# Altium PCB machnguon2.PcbDoc
Units mm, origin at the board's own origin, x right, y up, seen from the top; angles counter-clockwise.
Board outline 150.11 x 149.99 mm, 2 copper layers (Top Layer, Bottom Layer); 40 components, 24 nets, 103 pads, 0 vias.
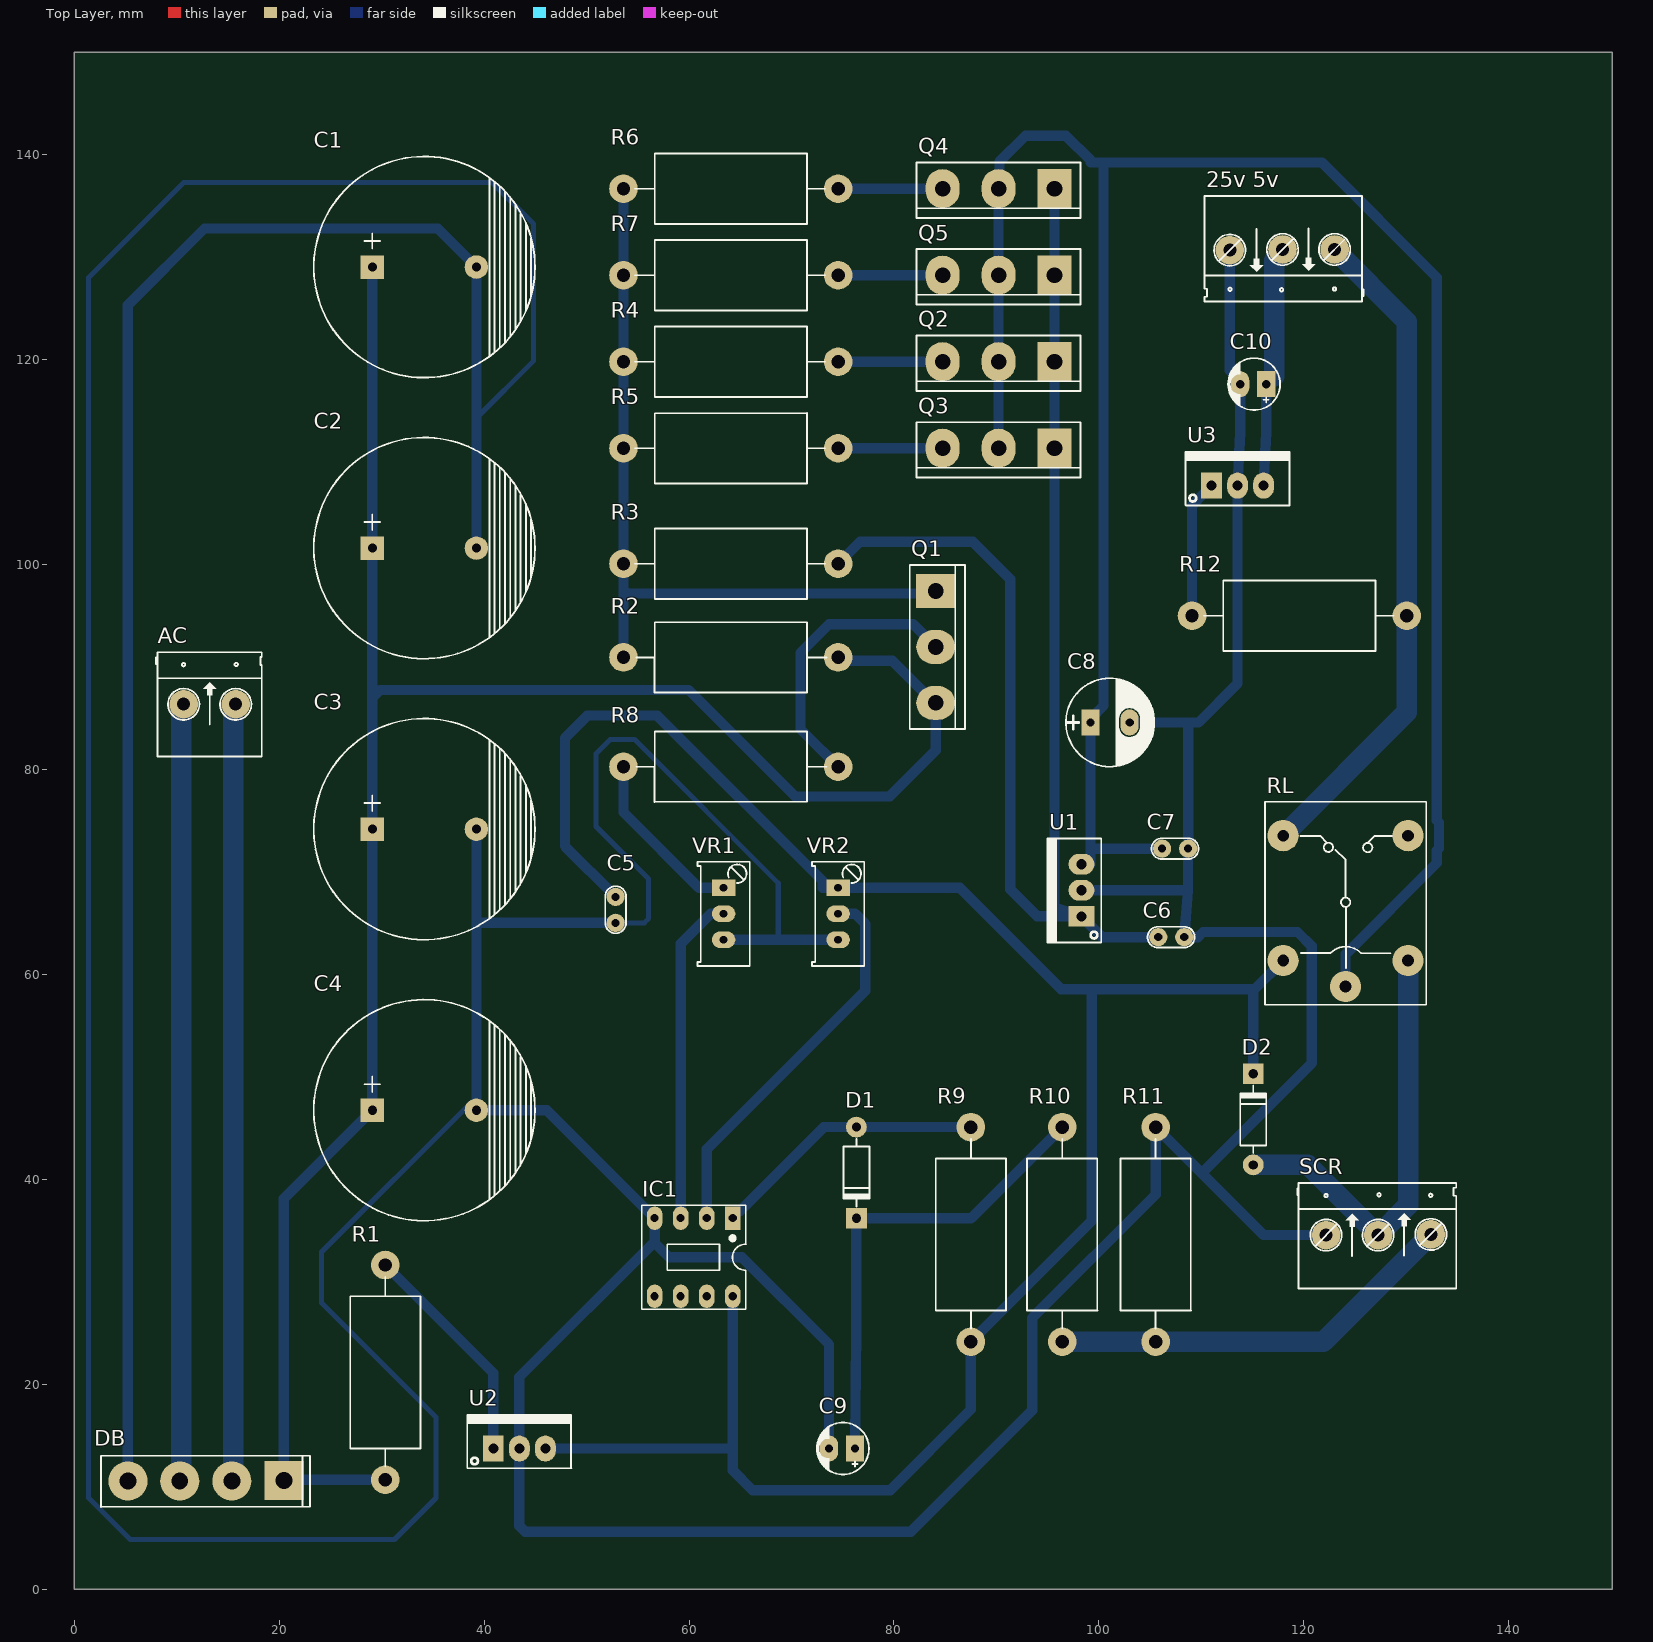
[diagram p0: Top Layer view]
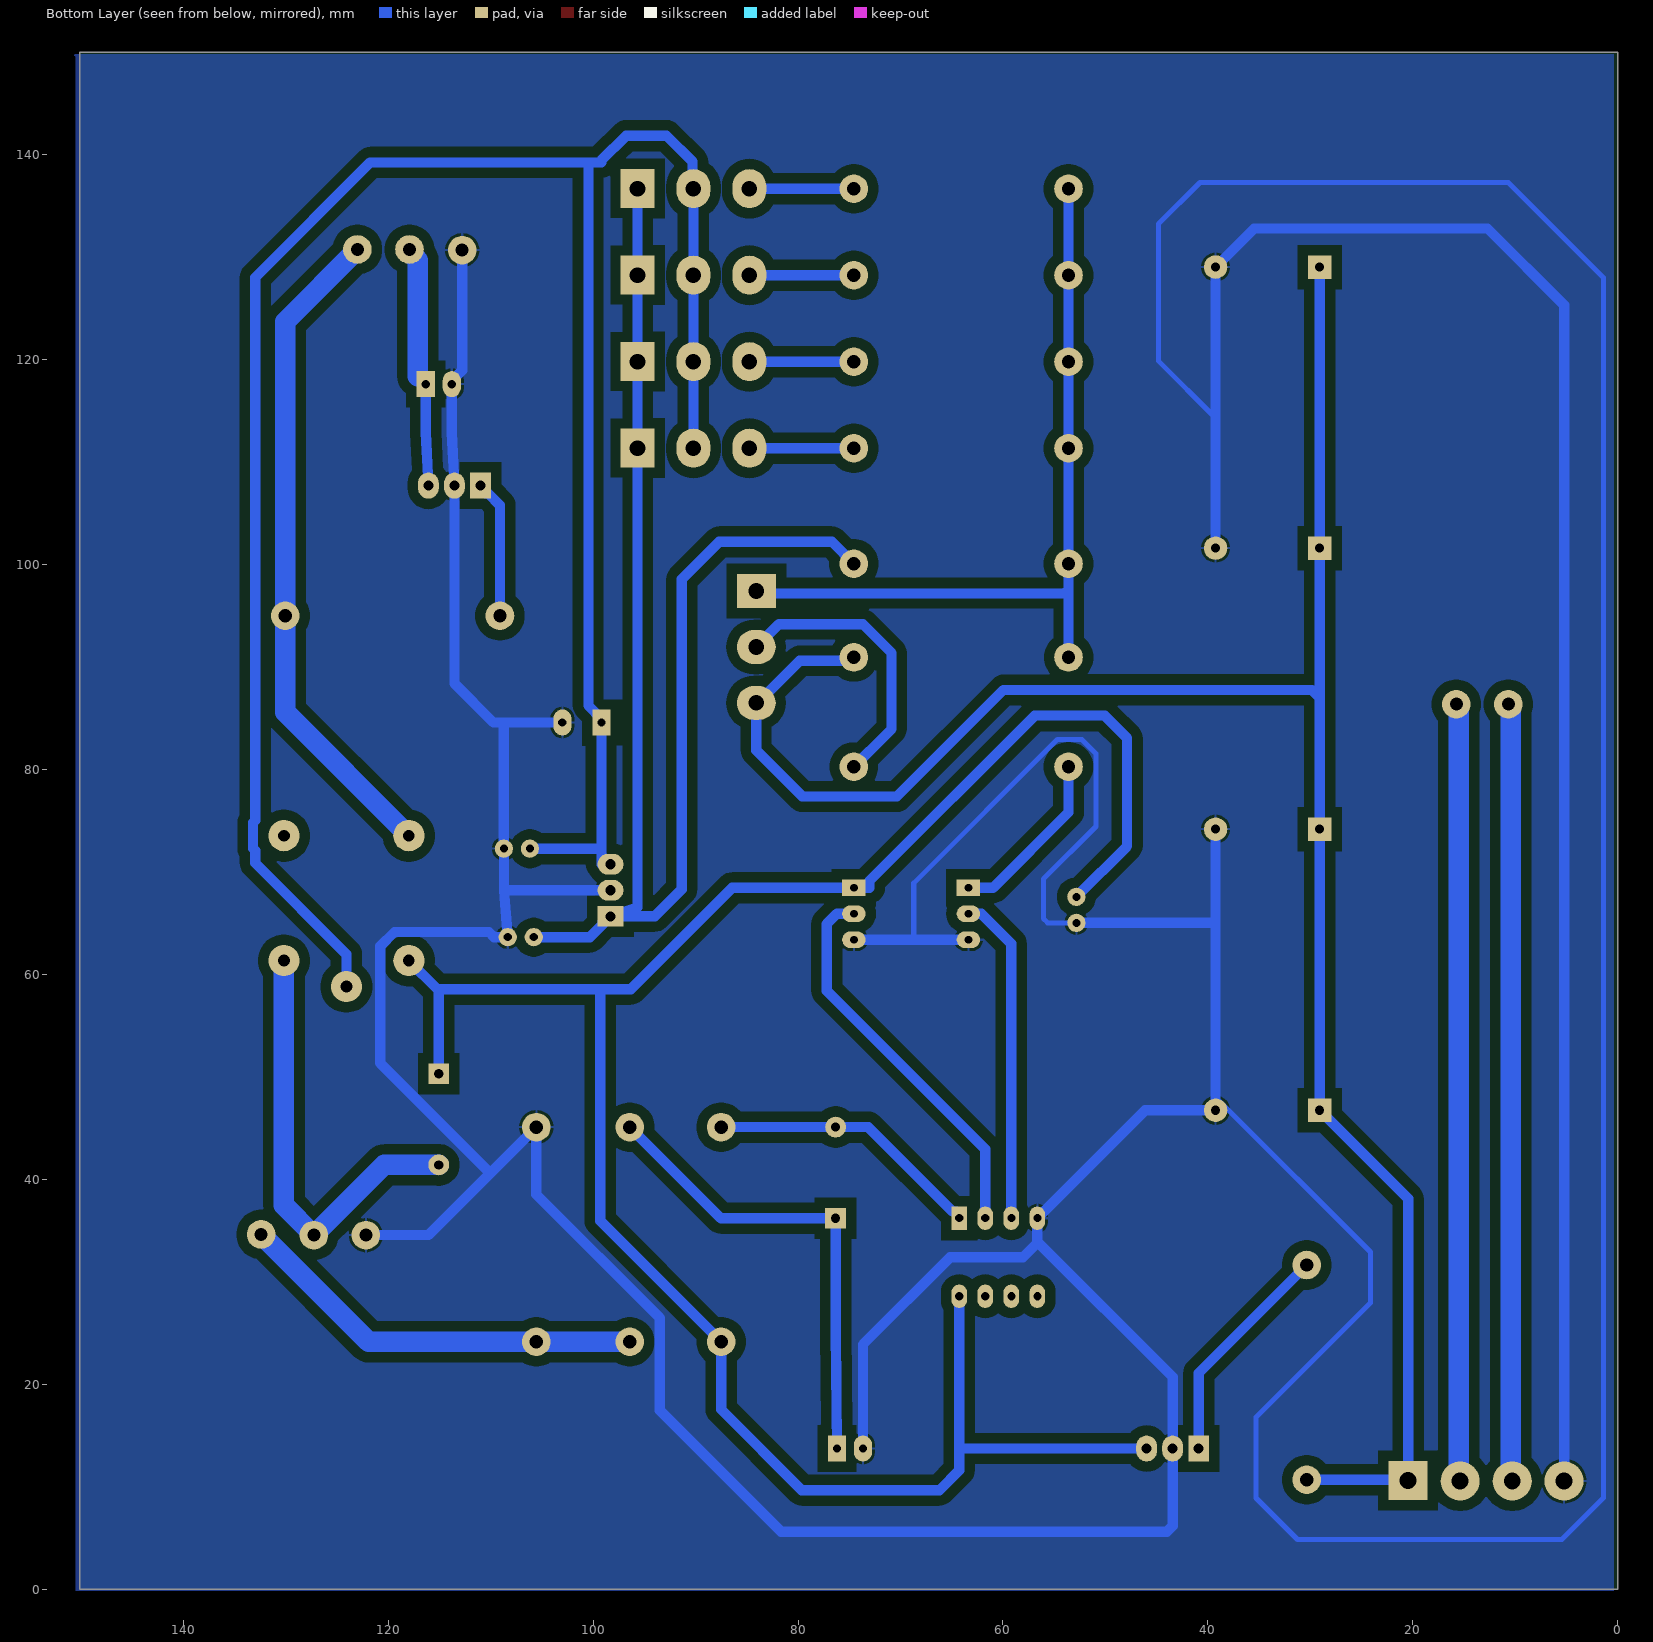
[diagram p1: Bottom Layer view, seen from below]
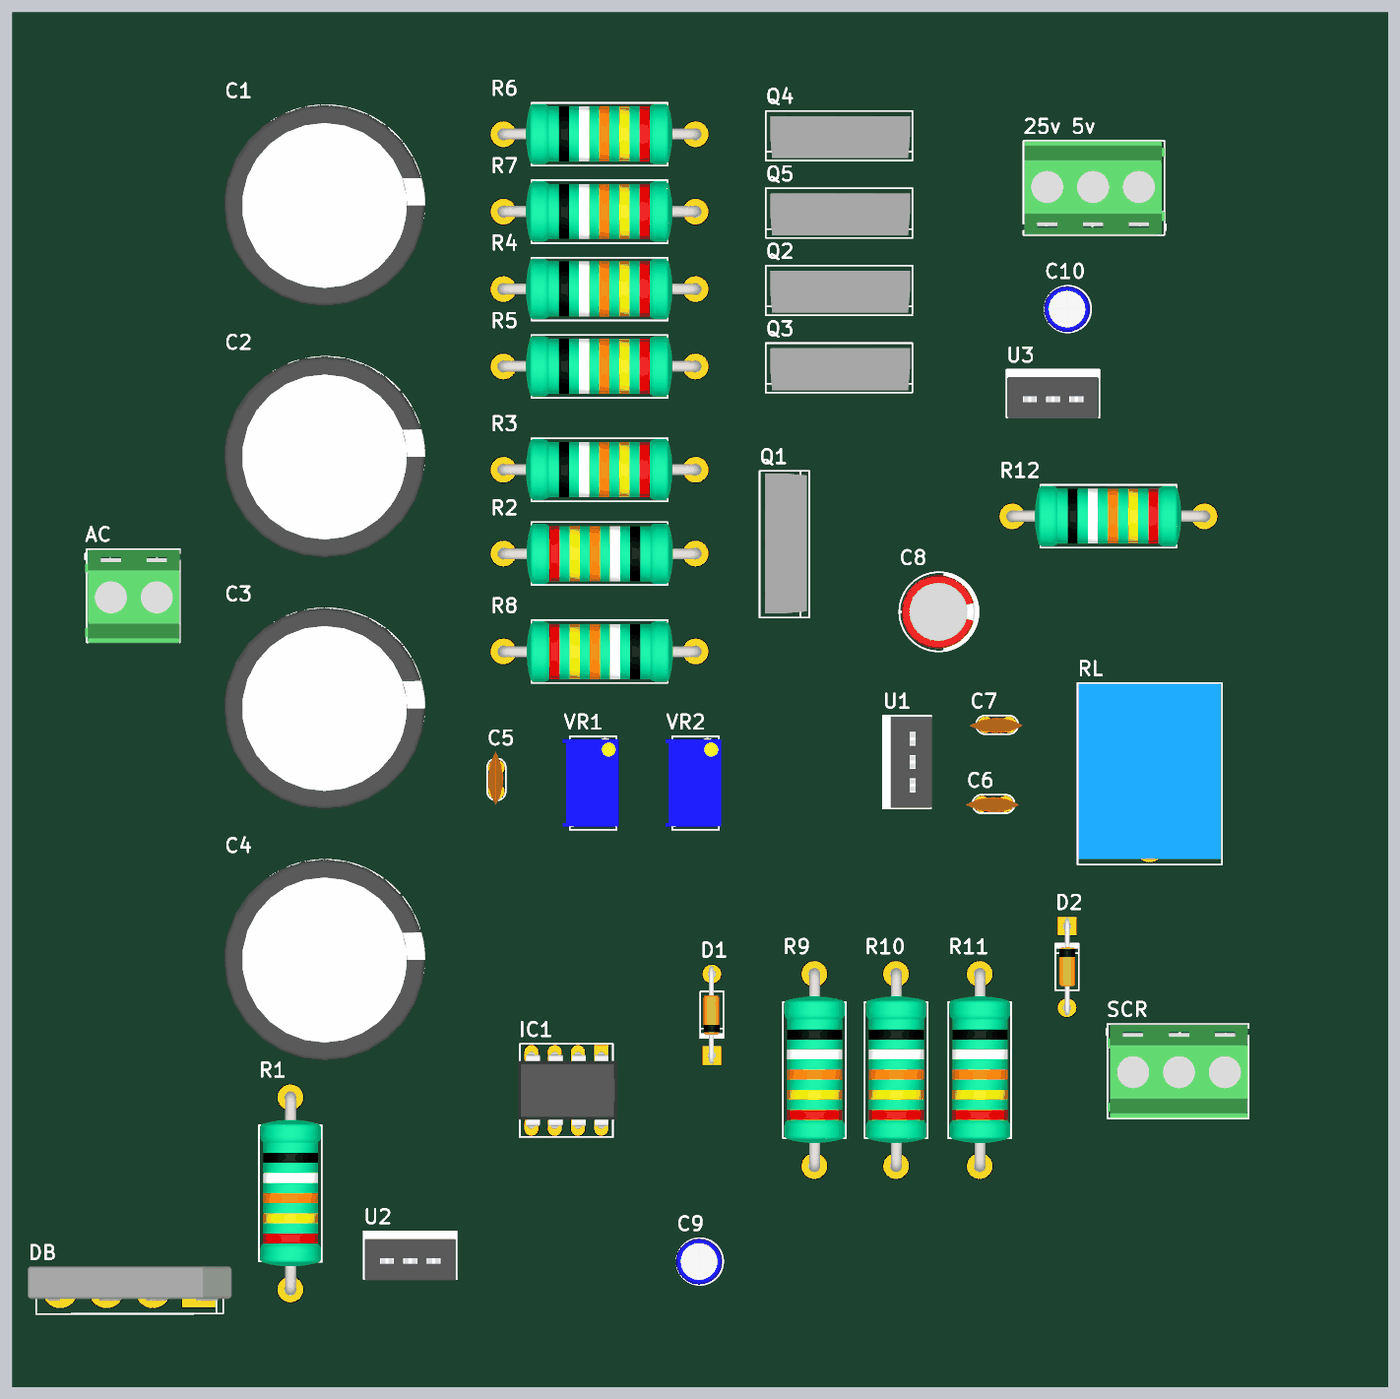
[diagram p2: 3D render of the assembled board from above, using the file's embedded part models]

## Layer stack, top to bottom
Top Solder: solder mask 0.0102, Solder Resist, Dk 3.5
Top Layer: signal copper 0.0356
Dielectric 1: dielectric 0.32, FR-4, Dk 4.8
Bottom Layer: signal copper 0.0356
Bottom Solder: solder mask 0.0102, Solder Resist, Dk 3.5

## Board outline
0,0 150.114,0 150.114,149.987 0,149.987

## Design rules (kind name [scope] priority, off if disabled: settings)
Clearance [All] p1: gap=1 ignorepadtopadclearanceinfootprint=FALSE
PolygonConnect [All] p1: connectstyle=Relief reliefconductorwidth=0.254 reliefentries=4 polygonreliefangle="90 Angle" airgapwidth=0.254
RoutingLayers [All] p1: top layer_v5=FALSE bottom layer_v5=TRUE
RoutingVias [All] p1: holewidth=0.711 width=1.27 viastyle="Through Hole" minholewidth=0.711 minwidth=1.27 maxholewidth=0.711 maxwidth=1.27
SolderMaskExpansion [All] p1: expansion=0.102 istentingtop=FALSE
Width [All] p1: maxlimit=2 minlimit=0.254 preferedwidth=0.5
29 further rules are at their usual default settings.

## Components (designator, comment, footprint, x,y, rotation, side; value= is the part's Value field where it differs from the comment)
"25v 5v" "Header 3" HED3 123.002,130.749 r180 top
AC "Header 2_1" HED2 10.668,86.36 r0 top value="Header 2"
C1 "4700uF/50V" CP4/8.5 29.083,129.032 r0 top
C2 "4700uF/50V" CP4/8.5 29.083,101.6 r0 top
C3 "4700uF/50V" CP4/8.5 29.083,74.168 r0 top
C4 "4700uF/50V" CP4/8.5 29.083,46.736 r0 top
C5 "100n" CN1 52.832,65.024 r90 top value=100pF
C6 "0.33u" CN1 108.331,63.627 r180 top value=100pF
C7 "0.1u" CN1 108.712,72.263 r180 top value=100pF
C8 "1000uF" CP1.5/3.4 99.187,84.582 r0 top value=1000uF/16V
C9 "1uF" CP1/2 76.2,13.716 r180 top value=10uF/50V
C10 "1uF" CP1/2 116.332,117.602 r180 top value=10uF/50V
D1 "1N4007" D1A 76.327,45.085 r90 top
D2 "1N4007" D1A 115.062,41.402 r270 top
DB "Diode Brideg" "CAU 5A" 20.447,10.541 r180 top value="Cau 1A"
IC1 "LM358" DIP8 60.579,32.385 r180 top
Q1 "B688" QTO-247 84.074,97.409 r270 top
Q2 "B688" QTO-247 95.669,119.796 r180 top
Q3 "B688" QTO-247 95.669,111.352 r180 top
Q4 "B688" QTO-247 95.669,136.684 r180 top
Q5 "B688" QTO-247 95.669,128.24 r180 top
R1 "10" RES-2W 30.48,20.955 r90 top
R2 "0.22" RES-2W 63.881,90.81 r0 top
R3 "22" RES-2W 64.262,100.202 r180 top
R4 "0.22" RES-2W 64.262,119.912 r180 top
R5 "0.22" RES-2W 64.262,111.468 r180 top
R6 "0.22" RES-2W 64.262,136.8 r180 top
R7 "0.22" RES-2W 64.262,128.356 r180 top
R8 "3k3" RES-2W 63.881,80.137 r0 top
R9 "4K7" RES-2W 87.63,34.417 r90 top
R10 "1k" RES-2W 96.544,34.417 r90 top
R11 "1k" RES-2W 105.664,34.417 r90 top
R12 "10" RES-2W 119.761,95.123 r180 top
RL "Relay 10A/12V" "RELAY 5" 124.079,67.056 r90 top value="Relay SPDT, 10A, 12V"
SCR "Header 3" HED3 122.174,34.544 r0 top
U1 "LM78xx" TO220-123 98.298,65.659 r90 top
U2 "LM78xx" TO220-123 40.894,13.716 r0 top
U3 "LM78xx" TO220-123 110.998,107.696 r0 top
VR1 "10K" VR1 63.373,68.453 r270 top value="VR 10K"
VR2 "10K" VR1 74.549,68.453 r270 top value="VR 10K"

## Footprints (in the part's own frame and the unit in brackets; to place one, negate y for a bottom-side part, rotate by r counter-clockwise, add the part's x,y. Pads: shape width x height; smd on the part's side, far side on the other; paste and mask are expansions set on the pad)
"CAU 5A" [mil] "CAU 5A DET"
  rect 150x150 hole 65: 1(0,-2)
  round 150 hole 65: 2(200,0) 3(400,0) 4(599,0)
  silkscreen extent -101,-97 702,100, body extent -139,-105 739,43, height 821
CN1 [mil]
  round 70 hole 31: 1(0,0) 2(100,0)
  silkscreen extent -40,-40 141,40, body extent -60,-30 170,37, height 265
CP1.5/3.4 [mil] "Tu hoa 220->470uF,16V, 470uF/16V,25V"
  rect 70x100 hole 32: 1(0,0)
  oval 70x100 hole 32: 2(150,0)
  silkscreen extent -95,-170 245,170, body extent -85,-157 230,157, height 446
CP1/2 [mil] "Tu hoa < 22uF/16>50V"
  rect 70x100 hole 32: 1(0,0)
  oval 70x100 hole 32: 2(100,0)
  silkscreen extent -53,-100 147,100, body extent -49,-99 149,99, height 287
CP4/8.5 [mil] "Tu hoa 4700uF/50V"
  rect 90x90 hole 35: 1(0,0)
  round 90 hole 35: 2(400,0)
  silkscreen extent -225,-425 625,425, body extent -236,-438 630,428, height 984
D1A [mil] "Diode 1A, W 100mil, L 350mil"
  round 80 hole 35: 1(0,0)
  rect 80x80 hole 35: 2(-350,0)
  silkscreen extent -305,-50 -45,50, body extent -386,-33 34,36, height 84
DIP8 [mil] "DIP, 8-Leads, Row Spacing 7.62mm, Pitch 2.54mm, Body 9.91x6.73mm"
  rect 60x90 hole 31: 1(-145,-150)
  oval 60x90 hole 31: 2(-45,-150) 3(55,-150) 4(155,-150) 5(155,150) 6(55,150) 7(-45,150) 8(-145,150)
  silkscreen extent -195,-200 205,200, body extent -213,-153 213,153, height 177
HED2 [mil] "Header 2, 2 pin, hight 300mil, Pin to Pin 200, Colour Green"
  round 110 hole 50: 1(0,0) 2(200,0)
  silkscreen extent -106,-201 300,200, body extent -106,-205 300,197, height 560
HED3 [mil] "Header 3, 3 pin, hight 300mil, Pin to Pin 200, Colour Green"
  round 110 hole 50: 1(0,0) 2(200,0) 3(402.62,2.62)
  silkscreen extent -111,-205 500,200, body extent -106,-204 496,198, height 560
QTO-247 [mil] "TO-247"
  rect 130x150 hole 60: 1(0,0)
  oval 130x150 hole 60: 2(215,0) 3(430,0)
  silkscreen extent -100,-100 530,113, body extent -89,-78 511,102, height 941
"RELAY 5" [mil] "Reley DPDT, 8 pin, 1A, W400mil, L800mil,H 300mil"
  round 120 hole 45: 1(-325,0) 2(255,240) 3(255,-240) 4(-225,-240) 5(-225,240)
  silkscreen extent -395,-310 385,310, body extent -371,-304 381,306, height 602
RES-2W [mil] "R2W, 2 pin, 700mil"
  round 110 hole 51.18: 1(-405,5) 2(420,5)
  silkscreen extent -355,-130 375,140, body extent -428,-126 446,134, height 277
TO220-123 [mil] "TO-220 - 1-2-3"
  rect 80x100 hole 39: 1(0,0)
  oval 80x100 hole 39: 2(100,0) 3(200,0)
  silkscreen extent -100,-76 300,130, body extent -95,-80 295,97, height 323
VR1 [mil] "Variable Resistor"
  rect 65x90 hole 30: 1(0,0)
  oval 65x90 hole 30: 2(100,0) 3(200,0)
  silkscreen extent -100,-100 301,100, body extent -88,-130 288,110, height 455

## Part data
"25v 5v" SCR: library part Hed3, "Header 3 (Green)"
AC: "Header, 2-Pin", Manufacturer="Generic Components", Class=Connector
C1 C2 C3 C4: library part CP7, "Cap 4700uF/50V"
C5 C6 C7: library part CN1, "Cap np  1pF - 472pF"
C8: library part CP4, "Cap 1000uF/16V - 220uF/50V", Description 1="2200uF-3300uF/6,3V - 1000uF-2200uF/10V", Description 2="1000uF/16V - 470uF => 1000uF/25V - 100uF/100V", Description 3=330uF>470uF/35V_220uF>470uF/50V_10uF>22uF/250V, Description 4="220uF => 330uF/63V - 10uF =>33uF/160 - 200V", Description 5="4,7uF>10uF/250V_3,3uF>10uF/400V - 2,2uF>4,7uF/450V"
C9 C10: library part CP1, "Cap P  0,1uF < 22uF , 16 - 50V", Description 1="10 => 220uF/6,3V/10V - 10uF => 100uF/16V", Description 2="0,1uF => 33uF/50V - 10uF => 22uF/63V", Description 3="0,47uF => 10uF/100V"
D1 D2: library part D1A, "Diode 1A"
DB: library part DB, "Convert AC to DC voltage, 4 pin"
IC1: "Low-Power Dual Operational Amplifier"
Q1 Q2 Q3 Q4 Q5: "Transistor Power Supply"
R1 R2 R3 R4 R5 R6 R7 R8 R9 R10 R11 R12: library part Res, "Res", Manufacturer="Generic Components", Class=Passive, Published=08/06/2000, Publisher="Altium Hobart Technology Centre", SubClass=R
RL: library part "Relay 5", "Relay SPDT,10A - 12VDC 5 Pin"
U1 U2 U3: "Positive Voltage Regulator", ComponentLink1Description="Manufacturer Link", ComponentLink1URL=http://www.st.com/, ComponentLink2Description=Datasheet, ComponentLink2URL=http://www.st.com/stonline/products/literature/ds/2146/l78m05c.pdf, DatasheetVersion=Apr-1994, LatestRevisionDate=17-Jul-2002, LatestRevisionNote="Re-released for DXP Platform.", Note="Tab is connected to pin 3 (GND).", PackageDescription="TO, Thru-Hole, Vertical, Heatsink Mounted; 3 In-Line Leads; Pitch 2.54 mm; Pin sequence 1, 3, 2", PackageReference=ISOWATT220AB, PackageVersion=Jul-1998, Published=24-Aug-2001, Publisher="Altium Limited"
VR1 VR2: library part VR1, "Var Resistor"

## Nets (pads, with @x,y where several pads share a name; then routed paths per layer and width w, separated by ;. In a path a pad name is that pad's centre, name@x,y a point inside that pad or via, vN(x,y) a via of type N, cw(c..) or ccw(c..) an arc to the next point about the centre after c; other vN are vias at no path point)
GND: "25v 5v.3" C1.2 C2.2 C3.2 C4.2 C5.1 C6.1 C7.1 C8.2 C9.2 C10.2 DB.4 IC1.4 R11.2 SCR.1 U1.2 U2.2 U3.2 VR1.3 VR2.3 | length 910.8
  Bottom Layer w0.5: C3.2 39.243,65.024 39.243,48.006 38.608,47.371 24.13,32.893 24.13,27.94 35.306,16.764 35.306,8.89 31.242,4.826 5.461,4.826 1.397,8.89 1.397,128.016 10.668,137.287 40.767,137.287 44.831,133.223 44.831,119.888 39.243,114.3 ; C5.1 55.626,65.024 56.054,65.452 56.054,69.295 50.927,74.422 50.927,81.534 52.304,82.911 54.69,82.911 68.707,68.894 68.707,63.373
  Bottom Layer w1: DB.4@5.207,10.541 5.207,125.298 12.7,132.791 35.484,132.791 C1.2 39.243,114.3 C2.2 ; C3.2 39.243,65.024 ; C5.1 39.243,65.024 ; 56.642,33.909 43.434,20.701 U2.2 43.434,6.174 44.02,5.588 81.636,5.588 93.497,17.45 93.497,26.467 105.537,38.506 R11.2 110.033,40.589 ; VR1.3 68.707,63.373 VR2.3 ; C9.2 73.66,23.876 65.151,32.385 58.039,32.385 56.896,33.528 56.642,33.782 IC1.4 56.642,36.434 56.4,36.676 56.161,36.676 46.101,46.736 C4.2 39.243,48.006 39.243,65.024 ; U1.2 108.702,68.199 ; C8.2 108.712,84.582 ; 112.776,130.683 112.776,118.958 113.792,117.942 C10.2 113.792,112.903 U3.2 113.538,88.392 109.728,84.582 108.712,84.582 ; SCR.1 116.078,34.544 112.776,37.846 110.033,40.589 ; 108.702,68.199 108.702,72.253 C7.1 108.712,84.582 ; 108.702,68.199 C6.1 109.652,63.627 110.16,64.135 119.38,64.135 120.777,62.738 120.777,51.333 110.033,40.589
"Net25v 5v_1": "25v 5v.1" R12.1 RL.2 | length 65.1
  Bottom Layer w2: RL.2 130.048,85.598 130.048,123.704 123.002,130.749
"Net25v 5v_2": "25v 5v.2" C10.1 U3.3 | length 23.9
  Bottom Layer w1: U3.3 116.332,112.903 116.332,117.983 116.721,118.372 C10.1@117.102,118.372
  Bottom Layer w2: C10.1@117.102,118.372 117.102,129.714 117.922,130.535 117.922,130.749
NetAC_1: AC.1 DB.3 | length 76.2
  Bottom Layer w2: DB.3@9.652,10.541 10.43,11.319 10.43,85.908 10.668,86.145 AC.1
NetAC_2: AC.2 DB.2 | length 75.9
  Bottom Layer w2: DB.2@15.494,10.541 15.494,85.545 15.596,85.647 15.596,86.208 AC.2
NetC1_1: C1.1 C2.1 C3.1 C4.1 DB.1 Q1.3 R1.1 R2.2 | length 209.4
  Bottom Layer w0.5: DB.1 DB.1@20.523,10.668
  Bottom Layer w1: DB.1 20.447,38.1 C4.1 C3.1 29.083,86.995 ; DB.1@20.523,10.668 R1.1 ; C1.1 C2.1 29.083,86.995 ; R2.2 74.892,90.594 79.84,90.594 83.947,86.487 Q1.3 84.074,81.864 79.577,77.367 70.334,77.367 59.944,87.757 29.845,87.757 29.083,86.995
NetC5_2: C5.2 D2.2 IC1.8 R9.1 RL.5 U2.3 VR2.1 | length 217.8
  Bottom Layer w1: U2.3 64.262,13.716 ; C5.2 47.879,72.517 47.879,83.058 50.07,85.249 56.908,85.249 73.025,69.132 73.025,68.453 VR2.1 86.411,68.453 96.317,58.547 115.189,58.547 RL.5 ; IC1.8 64.262,13.716 ; 99.314,58.547 99.314,35.941 R9.1 87.503,17.526 79.629,9.652 66.192,9.652 64.262,11.582 64.262,13.716 ; D2.2 115.062,58.42
NetC6_2: C6.2 Q2.1 Q3.1 Q4.1 Q5.1 R3.1 U1.1 | length 138.9
  Bottom Layer w1: R3.1 76.683,102.21 87.681,102.21 91.338,98.552 91.338,68.301 93.98,65.659 U1.1 ; Q4.1 Q5.1 Q2.1 Q3.1 95.669,66.51 U1.1 ; C6.2 100.33,63.627 99.068,64.889 99.068,65.143 98.552,65.659 U1.1
NetC7_2: C7.2 C8.1 Q2.2 Q3.2 Q4.2 Q5.2 RL.1 U1.3 | length 228.9
  Bottom Layer w1: Q3.2 Q2.2 Q5.2 Q4.2 90.29,136.766 90.29,139.312 92.837,141.859 96.774,141.859 99.187,139.446 99.187,139.243 100.457,139.243 ; 99.187,72.009 99.441,72.263 C7.2 ; RL.1 124.079,61.976 132.969,70.866 132.969,72.05 133.199,72.28 133.199,74.786 132.969,75.016 132.969,128.016 121.742,139.243 100.457,139.243 ; 99.187,71.628 99.187,72.263 99.187,84.963 100.457,86.233 100.457,139.243 ; 99.187,71.628 99.187,70.739 U1.3 99.187,71.628
NetC9_1: C9.1 D1.2 R10.2 | length 46.3
  Bottom Layer w1: C9.1 76.327,25.095 D1.2 87.527,36.195 R10.2
NetD1_1: D1.1 IC1.1 R9.2 | length 27.1
  Bottom Layer w1: IC1.1 64.262,36.576 64.524,36.838 64.905,36.838 73.152,45.085 R9.2
NetD2_1: D2.1 RL.4 SCR.2 | length 43
  Bottom Layer w2: D2.1 120.396,41.402 SCR.2 130.175,37.465 RL.4
NetIC1_2: IC1.2 VR2.2 | length 38.2
  Bottom Layer w1: IC1.2 61.722,42.926 77.192,58.396 77.192,64.921 76.2,65.913 VR2.2
NetIC1_3: IC1.3 VR1.2 | length 32.2
  Bottom Layer w1: IC1.3 59.182,62.992 62.103,65.913 VR1.2
NetQ1_1: Q1.1 R2.1 R3.2 R4.2 R5.2 R6.2 R7.2 | length 76.5
  Bottom Layer w1: R2.1 53.594,97.178 53.594,97.536 ; R6.2 R7.2 R4.2 R5.2 R3.2 53.594,97.536 ; Q1.1 83.843,97.178 53.952,97.178 53.594,97.536
NetQ1_2: Q1.2 R8.2 | length 28.6
  Bottom Layer w1: R8.2@75.012,79.801 70.866,83.947 70.866,91.364 73.66,94.158 81.864,94.158 Q1.2
NetQ2_3: Q2.3 R4.1 | length 10.2
  Bottom Layer w1: R4.1 79.629,119.785 79.64,119.796 Q2.3
NetQ3_3: Q3.3 R5.1 | length 10.2
  Bottom Layer w1: R5.1 79.629,111.341 79.64,111.352 Q3.3
NetQ4_3: Q4.3 R6.1 | length 10.2
  Bottom Layer w1: R6.1 79.629,136.673 79.64,136.684 Q4.3
NetQ5_3: Q5.3 R7.1 | length 10.2
  Bottom Layer w1: R7.1 79.629,128.229 79.64,128.24 Q5.3
NetR1_2: R1.2 U2.1 | length 22.3
  Bottom Layer w1: R1.2 40.894,21.082 U2.1
NetR8_1: R8.1 VR1.1 | length 17.3
  Bottom Layer w1: R8.1 53.594,75.819 60.96,68.453 VR1.1
NetR10_1: R10.1 R11.1 SCR.3 | length 40.3
  Bottom Layer w2: R10.1 R11.1 121.92,24.13 SCR.3
NetR12_2: R12.2 U3.1 | length 13.6
  Bottom Layer w1: R12.2 109.093,105.791 110.228,106.926 110.482,106.926 110.998,107.442 U3.1
pads on no net: IC1.5 IC1.6 IC1.7 RL.3

## Polygon pours and split planes (outlines as drawn)
GND on Bottom Layer "GND_L02_P000" (solid, pour order 0): 0.381,-0.191 0.381,149.796 150.749,149.796 150.495,149.542 150.495,-0.191